# EAGLE board Helical_Antenna (EAGLE 7.7.0)
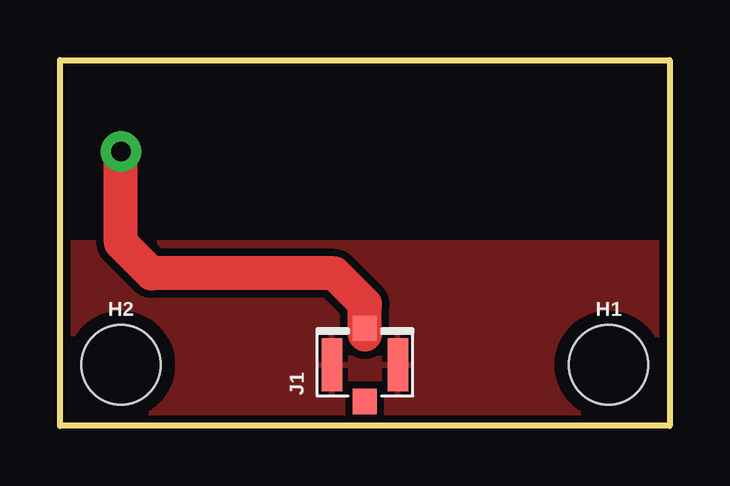
[diagram p0: board, top side]
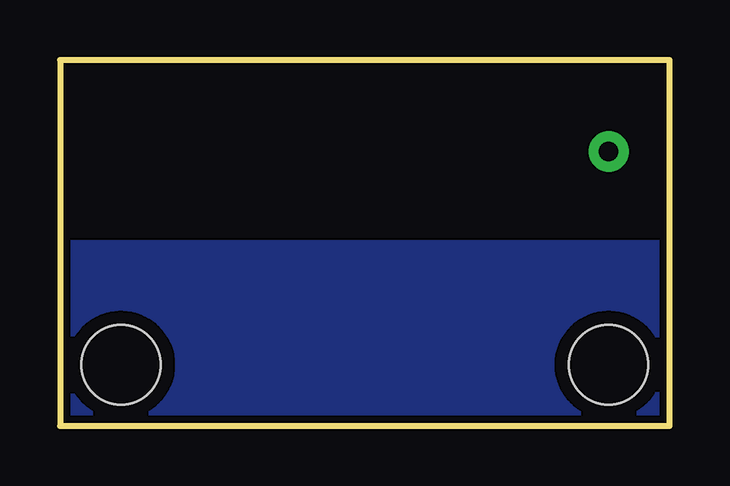
[diagram p1: board, bottom side, seen from below]

Size 25.4 x 15.24 mm. Coordinates in mm from the lower left corner, seen from the top.
Outline: 0,0 0,15.24 25.4,15.24 25.4,0 0,0
Copper layers (1*16): Top 0.035mm / dielectric 1.5mm / Bottom 0.035mm
Design rules "SparkFun-2-layer-PCBWay-LIMIT": minimum track width 6mil, minimum drill 0.3mm, track to track 6mil, track to pad 6mil, pad to pad 6mil, via to via 6mil, smd to smd 6mil, copper to edge 6mil, drill to drill 6mil, minimum pad ring 7mil, minimum via ring 7mil, stop-mask expansion 4mil, vias tented up to drill 25mil, thermal gap 10mil

## Footprints (pad centres in the part's own frame; a part is rotated, then mirrored left to right if it is on the bottom)
STAND-OFF = hole 3.302: 0,0
U.FL = smd 2.2 x 0.85: 1 0,1.375; 2 0,-1.375 | smd 1.05 x 1: FEED 1.525,0; NC -1.525,0

## Placement (x,y rotation side)
H1  STAND-OFF  [STAND-OFF]  22.86,2.54 0 top
H2  STAND-OFF  [STAND-OFF]  2.54,2.54 0 top
J1  U.FL  [U.FL]  12.7,2.54 90 top

## Library data of the parts
H1 H2 = SparkFun-Hardware
J1 = SparkFun-Connectors; PROD_ID: CONN-09193; SF_ID: WRL-09144

## Nets
FEED: J1.FEED
GND: J1.1 J1.2

## Tracks (layer width: path | path; a pad name or v marks a point on that pad's centre or on a via)
GND
  pour Top (isolate 0.305): 0,7.62 25.4,7.62 25.4,0 0,0
  pour Bottom (isolate 0.305): 25.4,7.62 0,7.62 0,0 25.4,0
N$2  (via drill 0.81 pad 1.68)
  Top 1.422: 12.7,3.81 12.7,5.08 11.43,6.35 3.81,6.35 2.54,7.62 v2.54,11.43